# EAGLE board mercedes_shield_v1 (EAGLE 5.11)
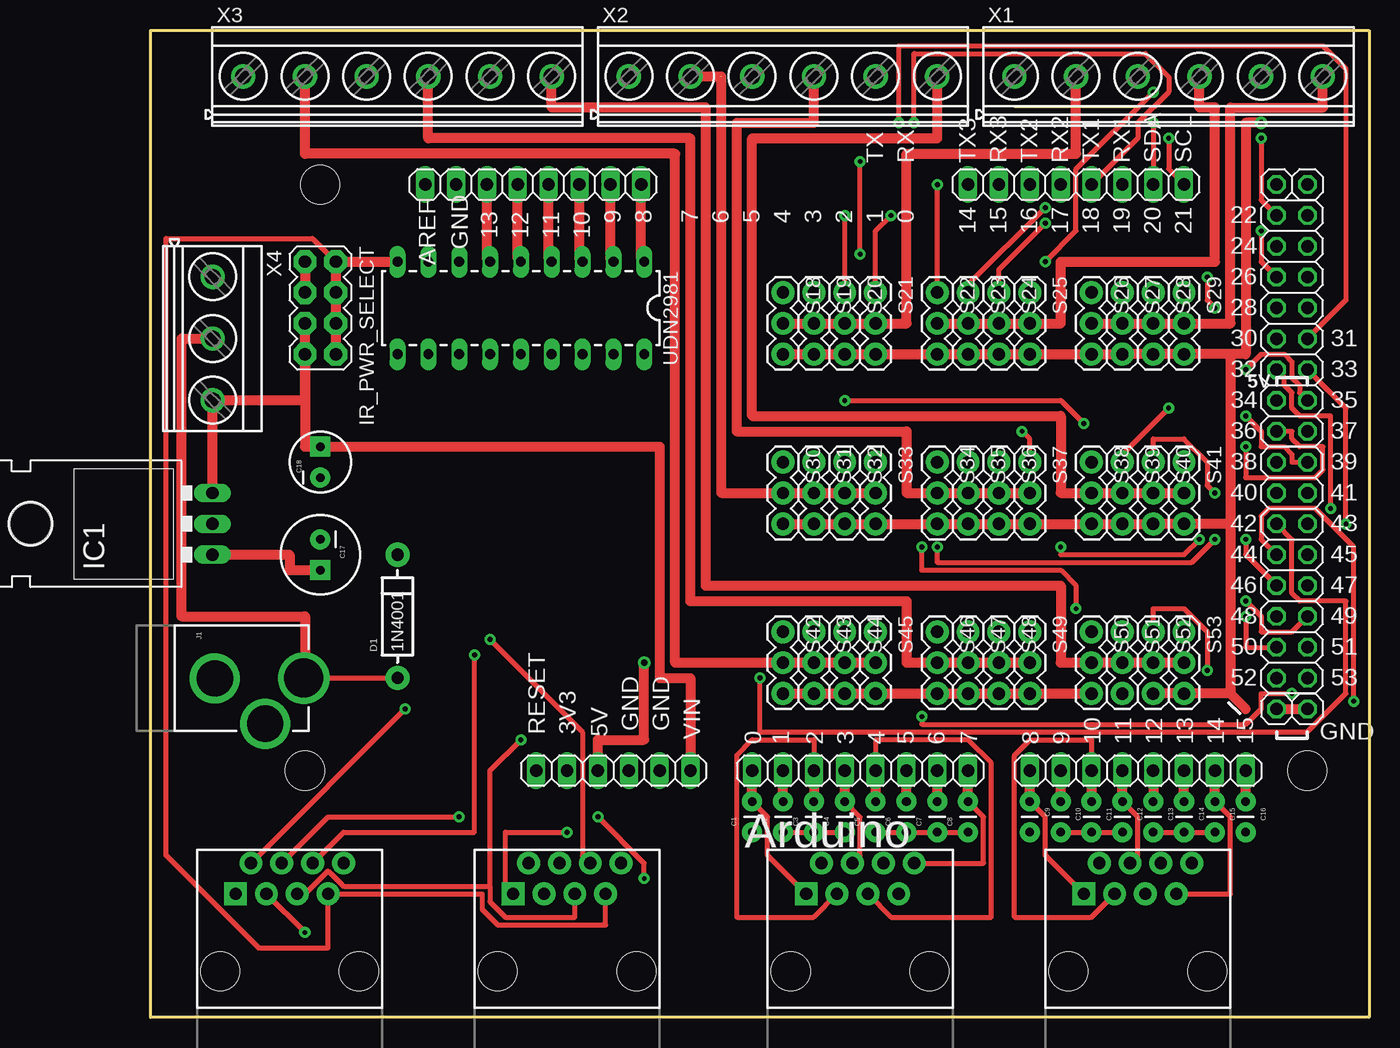
[diagram p0: board, top side]
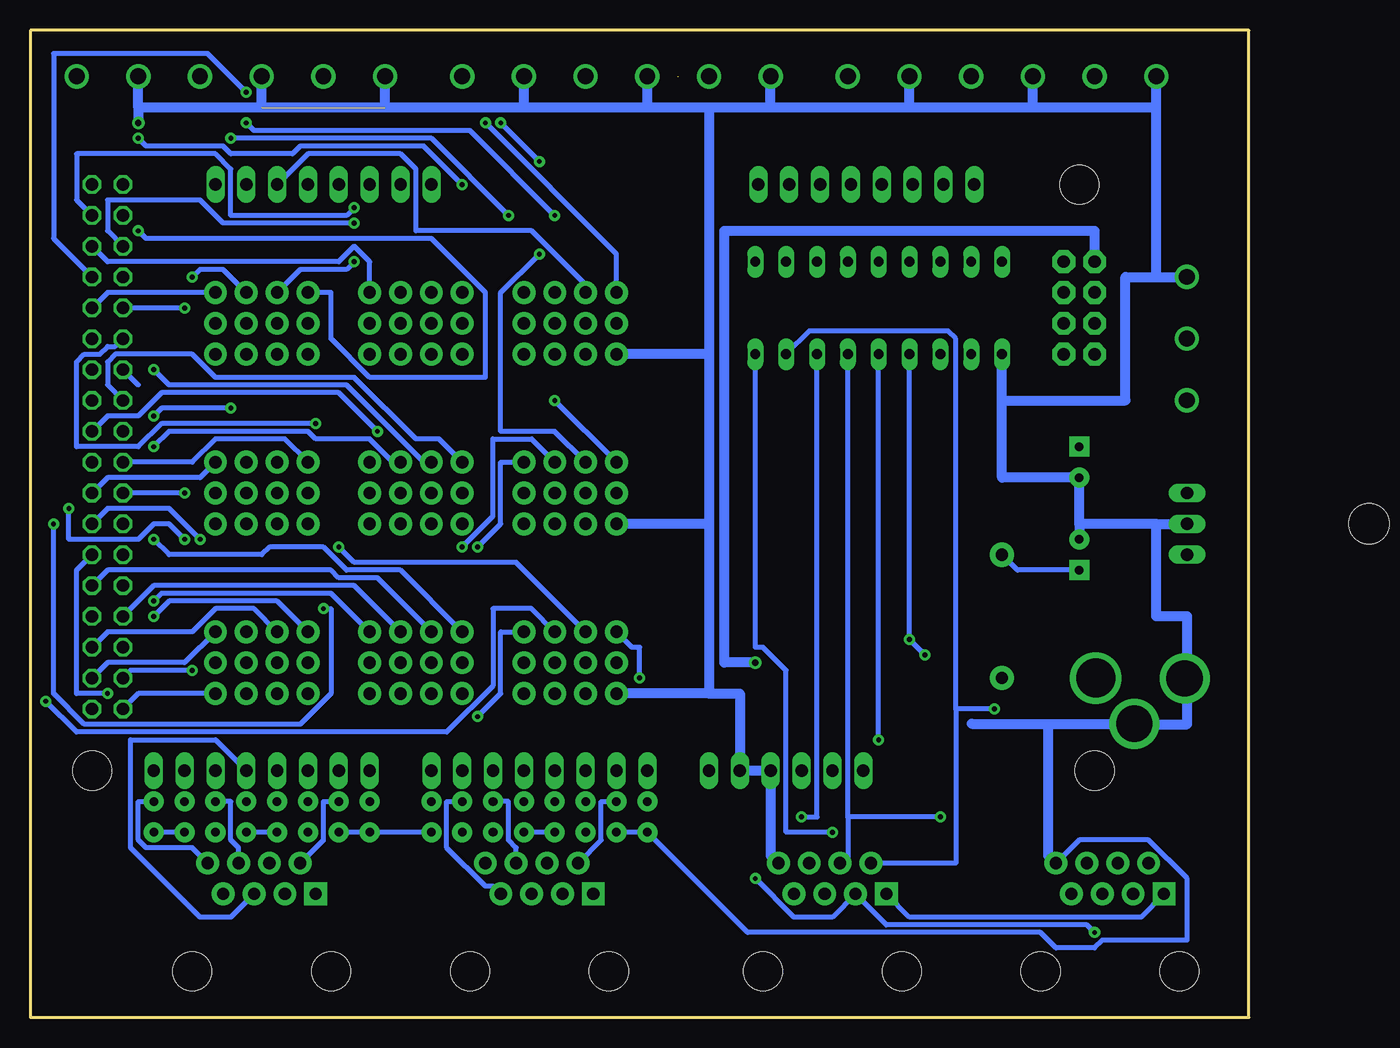
[diagram p1: board, bottom side, seen from below]

Size 100.33 x 81.28 mm. Coordinates in mm from the lower left corner, seen from the top.
Outline: 0,81.28 100.33,81.28 100.33,0 0,0 0,81.28
Copper layers (1*16): Top 0.035mm / dielectric 1.5mm / Bottom 0.035mm
Design rules "pcbtrain *": minimum track width 0.4mm, minimum drill 0.4mm, track to track 0.2mm, track to pad 0.2mm, pad to pad 0.2mm, via to via 0.2mm, smd to smd 0mil, copper to edge 10mil, drill to drill 0.2mm, minimum pad ring 10mil, minimum via ring 10mil, stop-mask expansion 0.125mm, vias tented up to drill 0mil, thermal gap 10mil
Net classes: 0 default: width 0.152 mm, drill 0.305 mm, clearance 0.152 mm
Holes 3.2 mm at 95.25,20.32 13.97,68.58 12.7,20.32

## Footprints (pad centres in the part's own frame; a part is rotated, then mirrored left to right if it is on the bottom)
RJ45-8 = drill 1 pad 1.88 square: 1 -4.445,6.35 | drill 1 pad 1.88 round: 2 -3.175,8.89; 3 -1.905,6.35; 4 -0.635,8.89; 5 0.635,6.35; 6 1.905,8.89; 7 3.175,6.35; 8 4.445,8.89 | hole 3.2: -5.715,0; 5.715,0
1X08 = drill 1.016 long: 1 -8.89,0; 2 -6.35,0; 3 -3.81,0; 4 -1.27,0; 5 1.27,0; 6 3.81,0; 7 6.35,0; 8 8.89,0
CAP-PTH-SMALL = drill 0.7 pad 1.651 round: 1 0,0; 2 2.54,0
CPOL-RADIAL-100UF-25V = drill 0.7 pad 1.651 square: 1 1.27,0 | drill 0.7 pad 1.651 round: 2 -1.27,0
CPOL-RADIAL-10UF-25V = drill 0.7 pad 1.651 square: 1 1.27,0 | drill 0.7 pad 1.651 round: 2 -1.27,0
DIODE-1N4001 = drill 1 pad 1.981 round: A -5.08,0; C 5.08,0
TO-220-ALT = drill 1.016 long: GND 0,-3.81; IN -2.54,-3.81; OUT 2.54,-3.81 | hole 3.302: 0,11.176
2X4 = drill 1.016 pad 1.88 octagon: 1 -3.81,-1.27; 2 -3.81,1.27; 3 -1.27,-1.27; 4 -1.27,1.27; 5 1.27,-1.27; 6 1.27,1.27; 7 3.81,-1.27; 8 3.81,1.27
POWER_JACK_PTH_LOCK = drill 2.997 pad 4.115 round: GND 0.025,6.557; GNDBREAK 3.762,10.7 | drill 3.2 pad 4.115 round: PWR 0,13.878
1X01 = drill 1.016 octagon: 1 0,0
1X06 = drill 1.016 long: 1 -6.35,0; 2 -3.81,0; 3 -1.27,0; 4 1.27,0; 5 3.81,0; 6 6.35,0
1X03 = drill 1.016 pad 1.88 round: 1 0,0; 2 2.54,0; 3 5.08,0
DIL18 = drill 0.813 long: 1 -10.16,-3.81; 2 -7.62,-3.81; 3 -5.08,-3.81; 4 -2.54,-3.81; 5 0,-3.81; 6 2.54,-3.81; 7 5.08,-3.81; 8 7.62,-3.81; 9 10.16,-3.81; 10 10.16,3.81; 11 7.62,3.81; 12 5.08,3.81; 13 2.54,3.81; 14 0,3.81; 15 -2.54,3.81; 16 -5.08,3.81; 17 -7.62,3.81; 18 -10.16,3.81
MKDSN1,5/6-5,08 = drill 1.3 pad 2 round: 1 -12.7,0.025; 2 -7.62,0.025; 3 -2.54,0.025; 4 2.54,0.025; 5 7.62,0.025; 6 12.7,0.025
MKDSN1,5/3-5,08 = drill 1.3 pad 2 round: 1 -7.641,0.025; 2 -2.561,0.025; 3 2.519,0.025
2X08 = drill 1.016 octagon: 1 -8.89,-1.27; 2 -8.89,1.27; 3 -6.35,-1.27; 4 -6.35,1.27; 5 -3.81,-1.27; 6 -3.81,1.27; 7 -1.27,-1.27; 8 -1.27,1.27; 9 1.27,-1.27; 10 1.27,1.27; 11 3.81,-1.27; 12 3.81,1.27; 13 6.35,-1.27; 14 6.35,1.27; 15 8.89,-1.27; 16 8.89,1.27

## Placement (x,y rotation side)
A0-8  RJ45-8PTH  [RJ45-8]  58.42,3.81 0 top
A8-15  RJ45-8PTH  [RJ45-8]  81.28,3.81 0 top
ADCH  [1X08]  81.28,20.32 0 top
ADCL  [1X08]  58.42,20.32 0 top
C1  0.1uF  [CAP-PTH-SMALL]  49.53,15.24 90 top
C2  0.1uF  [CAP-PTH-SMALL]  52.07,15.24 90 top
C3  0.1uF  [CAP-PTH-SMALL]  54.61,15.24 90 top
C4  0.1uF  [CAP-PTH-SMALL]  57.15,15.24 90 top
C5  0.1uF  [CAP-PTH-SMALL]  59.69,15.24 90 top
C6  0.1uF  [CAP-PTH-SMALL]  62.23,15.24 90 top
C7  0.1uF  [CAP-PTH-SMALL]  64.77,15.24 90 top
C8  0.1uF  [CAP-PTH-SMALL]  67.31,15.24 90 top
C9  0.1uF  [CAP-PTH-SMALL]  72.39,17.78 270 top
C10  0.1uF  [CAP-PTH-SMALL]  74.93,17.78 270 top
C11  0.1uF  [CAP-PTH-SMALL]  77.47,17.78 270 top
C12  0.1uF  [CAP-PTH-SMALL]  80.01,17.78 270 top
C13  0.1uF  [CAP-PTH-SMALL]  82.55,17.78 270 top
C14  0.1uF  [CAP-PTH-SMALL]  85.09,17.78 270 top
C15  0.1uF  [CAP-PTH-SMALL]  87.63,17.78 270 top
C16  0.1uF  [CAP-PTH-SMALL]  90.17,17.78 270 top
C17  100UF  [CPOL-RADIAL-100UF-25V]  13.97,38.1 270 top
C18  10uF  [CPOL-RADIAL-10UF-25V]  13.97,45.72 90 top
COMMUNICATION  [1X08]  76.2,68.58 180 top
D1  1N4001  [DIODE-1N4001]  20.32,33.02 90 top
IC1  [TO-220-ALT]  1.27,40.64 90 top
IR_PWR_SELECT  M04X2  [2X4]  13.97,58.42 270 top
J1  POWER_JACKPTH_LOCK  [POWER_JACK_PTH_LOCK]  -1.27,27.94 270 top
JP1  [1X01]  92.71,68.58 0 top
JP2  [1X01]  95.25,68.58 0 top
JP3  [1X01]  92.71,25.4 0 top
JP4  [1X01]  95.25,25.4 0 top
POWER  [1X06]  38.1,20.32 0 top
PWMH  [1X08]  31.5,68.58 180 top
S18  [1X03]  52.07,59.69 270 top
S19  [1X03]  54.61,59.69 270 top
S20  [1X03]  57.15,59.69 270 top
S21  [1X03]  59.69,59.69 270 top
S22  [1X03]  64.77,59.69 270 top
S23  [1X03]  67.31,59.69 270 top
S24  [1X03]  69.85,59.69 270 top
S25  [1X03]  72.39,59.69 270 top
S26  [1X03]  77.47,59.69 270 top
S27  [1X03]  80.01,59.69 270 top
S28  [1X03]  82.55,59.69 270 top
S29  [1X03]  85.09,59.69 270 top
S30  [1X03]  52.07,45.72 270 top
S31  [1X03]  54.61,45.72 270 top
S32  [1X03]  57.15,45.72 270 top
S33  [1X03]  59.69,45.72 270 top
S34  [1X03]  64.77,45.72 270 top
S35  [1X03]  67.31,45.72 270 top
S36  [1X03]  69.85,45.72 270 top
S37  [1X03]  72.39,45.72 270 top
S38  [1X03]  77.47,45.72 270 top
S39  [1X03]  80.01,45.72 270 top
S40  [1X03]  82.55,45.72 270 top
S41  [1X03]  85.09,45.72 270 top
S42  [1X03]  52.07,31.75 270 top
S43  [1X03]  54.61,31.75 270 top
S44  [1X03]  57.15,31.75 270 top
S45  [1X03]  59.69,31.75 270 top
S46  [1X03]  64.77,31.75 270 top
S47  [1X03]  67.31,31.75 270 top
S48  [1X03]  69.85,31.75 270 top
S49  [1X03]  72.39,31.75 270 top
S50  [1X03]  77.47,31.75 270 top
S51  [1X03]  80.01,31.75 270 top
S52  [1X03]  82.55,31.75 270 top
S53  [1X03]  85.09,31.75 270 top
U$3  RJ45-8PTH  [RJ45-8]  34.29,3.81 0 top
U$4  RJ45-8PTH  [RJ45-8]  11.43,3.81 0 top
UDN2981  [DIL18]  30.48,58.42 180 top
X1  MKDSN1,5/6-5,08  [MKDSN1,5/6-5,08]  83.82,77.47 0 top
X2  MKDSN1,5/6-5,08  [MKDSN1,5/6-5,08]  52.07,77.47 0 top
X3  MKDSN1,5/6-5,08  [MKDSN1,5/6-5,08]  20.32,77.47 0 top
X4  MKDSN1,5/3-5,08  [MKDSN1,5/3-5,08]  5.08,53.34 270 top
XIOH  [2X08]  93.98,57.15 90 top
XIOL  [2X08]  93.98,36.83 90 top

## Library data of the parts
A0-8 A8-15 C1-C18 D1 IC1 IR_PWR_SELECT J1 S18-S53 U$3 U$4 UDN2981 = SparkFun
ADCH ADCL COMMUNICATION JP1-JP4 POWER PWMH XIOH XIOL = pinhead
X1-X3 = con-phoenix-508; MPN: SMKDSN1,5/6-5,08; OC_FARNELL: 1792907; OC_NEWARK: 70R0302
X4 = con-phoenix-508; MPN: SMKDSN1,5/3-5,08; OC_FARNELL: 1792904; OC_NEWARK: 70R0299

## Nets
+3V3: POWER.2
+5V: IR_PWR_SELECT.1 IR_PWR_SELECT.3 POWER.3
ADC0: A0-8.1 ADCL.1 C1.2
ADC1: A0-8.2 ADCL.2 C2.2
ADC2: A0-8.3 ADCL.3 C3.2
ADC3: A0-8.4 ADCL.4 C4.2
ADC4: A0-8.5 ADCL.5 C5.2
ADC5: A0-8.6 ADCL.6 C6.2
ADC6: A0-8.7 ADCL.7 C7.2
ADC7: A0-8.8 ADCL.8 C8.2
ADC8: A8-15.1 ADCH.1 C9.1
ADC9: A8-15.2 ADCH.2 C10.1
ADC10: A8-15.3 ADCH.3 C11.1
ADC11: A8-15.4 ADCH.4 C12.1
ADC12: A8-15.5 ADCH.5 C13.1
ADC13: A8-15.6 ADCH.6 C14.1
ADC14: A8-15.7 ADCH.7 C15.1
ADC15: A8-15.8 ADCH.8 C16.1
AREF: PWMH.8
GND: C1.1 C2.1 C3.1 C4.1 C5.1 C6.1 C7.1 C8.1 C9.2 C10.2 C11.2 C12.2 C13.2 C14.2 C15.2 C16.2 C17.2 C18.2 IC1.GND J1.GND J1.GNDBREAK JP3.1 JP4.1 POWER.4 POWER.5 S18.3 S19.3 S20.3 S21.3 S22.3 S23.3 S24.3 S25.3 S26.3 S27.3 S28.3 S29.3 S30.3 S31.3 S32.3 S33.3 S34.3 S35.3 S36.3 S37.3 S38.3 S39.3 S40.3 S41.3 S42.3 S43.3 S44.3 S45.3 S46.3 S47.3 S48.3 S49.3 S50.3 S52.3 S53.3 U$3.8 U$4.8 UDN2981.10 X1.3 X1.5 X2.1 X2.3 X2.5 X3.3 X3.5 X4.1
IR_VCC: IR_PWR_SELECT.2 IR_PWR_SELECT.4 IR_PWR_SELECT.6 IR_PWR_SELECT.8 U$3.7 U$4.7 UDN2981.9
L1: U$3.1 U$4.1 UDN2981.18
L2: U$3.2 U$4.2 UDN2981.17
L3: U$3.3 U$4.3 UDN2981.16
L4: U$3.4 U$4.4 UDN2981.15
L5: U$3.5 U$4.5 UDN2981.14
N$1: PWMH.1 UDN2981.1
N$2: PWMH.2 UDN2981.2
N$3: PWMH.3 UDN2981.3
N$4: PWMH.4 UDN2981.4
N$5: PWMH.5 UDN2981.5
N$6: PWMH.6 UDN2981.6
N$7: S51.3
N$10: C17.1 D1.C IC1.IN
P18: COMMUNICATION.4 S18.1
P19: COMMUNICATION.3 S19.1
P20: COMMUNICATION.2 S20.1
P21: COMMUNICATION.1 S21.1
P22: S22.1 XIOH.16
P23: S23.1 XIOH.15
P24: S24.1 XIOH.14
P25: S25.1 XIOH.13
P26: S26.1 XIOH.12
P27: S27.1 XIOH.11
P28: S28.1 XIOH.10
P29: S29.1 XIOH.9
P30: S30.1 XIOH.8
P31: S31.1 XIOH.7
P32: S32.1 XIOH.6
P33: S33.1 XIOH.5
P34: S34.1 XIOH.4
P35: S35.1 XIOH.3
P36: S36.1 XIOH.2
P37: S37.1 XIOH.1
P38: S38.1 XIOL.16
P39: S39.1 XIOL.15
P40: S40.1 XIOL.14
P41: S41.1 XIOL.13
P42: S42.1 XIOL.12
P43: S43.1 XIOL.11
P44: S44.1 XIOL.10
P45: S45.1 XIOL.9
P46: S46.1 XIOL.8
P47: S47.1 XIOL.7
P48: S48.1 XIOL.6
P49: S49.1 XIOL.5
P50: S50.1 XIOL.4
P51: S51.1 XIOL.3
P52: S52.1 XIOL.2
P53: S53.1 XIOL.1
PSU_VIN: D1.A J1.PWR X4.2
RESET: POWER.1
RXD2: COMMUNICATION.5
RXD3: COMMUNICATION.7
S$2: X2.2
SV1: S18.2 S19.2 S20.2 S21.2 X1.2
SV2: S22.2 S23.2 S24.2 S25.2 X1.4
SV3: S26.2 S27.2 S28.2 S29.2 X1.6
SV4: S30.2 S31.2 S32.2 S33.2
SV5: S34.2 S35.2 S36.2 S37.2 X2.4
SV6: S38.2 S39.2 S40.2 S41.2 X2.6
SV7: S42.2 S43.2 S44.2 S45.2 X3.2
SV8: S46.2 S47.2 S48.2 S49.2 X3.4
SV9: S50.2 S51.2 S52.2 S53.2 X3.6
TXD2: COMMUNICATION.6
TXD3: COMMUNICATION.8
VI: U$3.6 U$4.6 UDN2981.13
VIN: C18.1 IC1.OUT IR_PWR_SELECT.5 IR_PWR_SELECT.7 POWER.6 X4.3

## Tracks (layer width: path | path; a pad name or v marks a point on that pad's centre or on a via)
+5V  (via drill 0.51)
  Top 0.813: IR_PWR_SELECT.1 IR_PWR_SELECT.3 | POWER.3 36.83,22.86 40.64,22.86 v40.64,29.21
  Bottom 0.813: v40.64,29.21 43.18,29.21 43.18,64.77 12.7,64.77 IR_PWR_SELECT.1
ADC0
  Top 0.4: A0-8.1 50.8,13.34 50.8,16.51 C1.2
  Top 0.813: C1.2 ADCL.1
ADC1
  Top 0.813: C2.2 ADCL.2
  Bottom 0.4: A0-8.2 53.34,14.61 53.34,17.78 C2.2
ADC2
  Top 0.4: A0-8.3 54.61,8.26 48.26,8.26 48.26,21.59 49.53,22.86 54.61,22.86 ADCL.3
  Top 0.813: ADCL.3 C3.2
ADC3
  Top 0.4: A0-8.4 58.42,13.34 58.42,16.51 C4.2
  Top 0.813: C4.2 ADCL.4
ADC4
  Top 0.4: A0-8.5 60.96,8.26 69.22,8.26 69.22,20.95 67.31,22.86 59.69,22.86 ADCL.5
  Top 0.813: ADCL.5 C5.2
ADC5
  Top 0.813: C6.2 ADCL.6
  Bottom 0.4: A0-8.6 60.32,13.97 60.96,14.61 60.96,17.78 C6.2
ADC6
  Top 0.813: C7.2 ADCL.7
  Bottom 0.4: A0-8.7 62.23,10.79 62.87,10.79 66.04,13.97 66.04,17.78 C7.2
ADC7
  Top 0.4: A0-8.8 68.58,12.7 68.58,16.51 C8.2
  Top 0.813: C8.2 ADCL.8
ADC8
  Top 0.4: A8-15.1 73.66,13.34 73.66,16.51 C9.1
  Top 0.813: C9.1 ADCH.1
ADC9
  Top 0.813: C10.1 ADCH.2
  Bottom 0.4: A8-15.2 76.2,14.61 76.2,17.78 C10.1
ADC10
  Top 0.4: A8-15.3 77.47,8.26 71.12,8.26 71.12,21.59 72.39,22.86 77.47,22.86 ADCH.3
  Top 0.813: ADCH.3 C11.1
ADC11
  Top 0.4: A8-15.4 81.28,13.34 81.28,16.51 C12.1
  Top 0.813: C12.1 ADCH.4
ADC12
  Top 0.813: ADCH.5 C13.1
  Bottom 0.4: A8-15.5 83.82,8.26 86.36,8.26 92.08,13.97 92.08,22.86 85.09,22.86 ADCH.5
ADC13
  Top 0.813: C14.1 ADCH.6
  Bottom 0.4: A8-15.6 83.19,13.97 83.82,14.61 83.82,17.78 C14.1
ADC14
  Top 0.4: A8-15.7 88.9,10.16 88.9,16.51 C15.1
  Top 0.813: C15.1 ADCH.7
ADC15
  Top 0.813: C16.1 ADCH.8
  Bottom 0.4: A8-15.8 87,13.97 90.81,13.97 91.44,14.61 91.44,17.78 C16.1
GND  (via drill 0.51)  (1 unrouted)
  Top 0.4: C15.2 C14.2 C13.2 | C12.2 C11.2 C10.2 | C8.1 C7.1 C6.1 C5.1 | C4.1 C3.1 C2.1
  Top 0.813: JP3.1 JP4.1 | S50.3 S49.3 S48.3 S47.3 S46.3 S45.3 S44.3 S43.3 S42.3 | S52.3 S53.3 88.9,26.67 | 88.9,26.67 90.17,25.4 | 88.9,40.64 S41.3 S40.3 S39.3 S38.3 S37.3 S36.3 S35.3 S34.3 S33.3 S32.3 S31.3 S30.3 | 88.9,40.64 88.9,26.67 | 88.9,54.61 S29.3 S28.3 S27.3 S26.3 S25.3 S24.3 S23.3 S22.3 S21.3 S20.3 S19.3 S18.3 | 88.9,54.61 88.9,40.64 | 88.9,54.61 90.17,54.61 90.17,73.66 v91.44,73.66
  Bottom 0.4: JP3.1 91.44,26.67 S53.3 | C15.2 C16.2 | C12.2 C13.2 | C10.2 C9.2 C8.1 | C4.1 C5.1 | C2.1 C1.1 41.27,6.99 17.14,6.99 15.88,5.71 12.7,5.71 12.07,6.35 5.08,6.35 5.08,11.43 8.26,14.61 13.97,14.61 U$4.8
  Bottom 0.813: U$3.8 39.37,13.34 POWER.4 POWER.5 41.91,26.67 44.45,26.67 | 91.44,74.93 X1.5 | 91.44,74.93 v91.44,73.66 | 44.45,26.67 S42.3 | 81.28,74.93 X1.3 | 81.28,74.93 91.44,74.93 | 59.69,74.93 X2.5 | 59.69,74.93 71.12,74.93 | 71.12,74.93 81.28,74.93 | 44.45,40.64 44.45,26.67 | 44.45,40.64 S30.3 | 44.45,54.61 44.45,40.64 | 44.45,54.61 S18.3 | 49.53,74.93 X2.3 | 49.53,74.93 59.69,74.93 | 44.45,74.93 49.53,74.93 | 44.45,74.93 44.45,54.61 | 39.37,74.93 X2.1 | 39.37,74.93 44.45,74.93 | 27.94,74.93 X3.5 | 27.94,74.93 39.37,74.93 | 17.78,74.93 X3.3 | 17.78,74.93 27.94,74.93 | X4.1 5.13,60.96 7.62,60.96 | 7.62,74.93 17.78,74.93 | 7.62,74.93 7.62,77.47 | 7.62,60.96 7.62,74.93 | 7.62,60.96 10.16,60.96 10.16,50.8 20.32,50.8 | 20.32,50.8 UDN2981.10 | 20.32,50.8 20.32,44.45 C18.2 13.97,40.64 | 13.97,40.64 C17.2 | 7.62,40.64 IC1.GND | 7.62,40.64 13.97,40.64 | 7.62,40.64 7.62,33.02 5.08,33.02 5.08,27.94 | J1.GND 5.11,27.91 5.08,27.94 | 5.08,27.94 5.08,24.13 9.38,24.13 J1.GNDBREAK 22.81,24.18 16.51,24.13 16.51,13.34 U$4.8 | 71.12,74.93 71.12,77.47
IR_VCC
  Top 0.4: U$3.7 37.46,7.62 28.57,7.62 27.3,8.89 27.3,10.16 U$4.7 14.61,5.71 8.89,5.71 1.27,13.34 1.27,64.14 13.34,64.14 IR_PWR_SELECT.2
  Top 0.813: IR_PWR_SELECT.8 IR_PWR_SELECT.6 IR_PWR_SELECT.4 IR_PWR_SELECT.2 UDN2981.9
L1  (via drill 0.4)
  Top 0.4: v34.29,15.24 29.21,15.24 29.21,10.79 U$3.1
  Bottom 0.4: UDN2981.18 40.64,30.48 40,30.48 38.1,28.57 38.1,15.24 v34.29,15.24 | U$4.1 8.89,8.26 27.94,8.26 U$3.1
L2  (via drill 0.4)
  Top 0.4: U$4.2 v20.96,25.4
  Bottom 0.4: UDN2981.17 36.2,56.52 24.77,56.52 24.13,55.88 24.13,25.4 | 24.13,25.4 24.13,12.7 U$3.2 | v20.96,25.4 24.13,25.4
L3  (via drill 0.4)
  Top 0.4: v36.83,16.51 40.64,12.7 v40.64,11.43 | v12.7,6.99 U$4.3
  Bottom 0.4: UDN2981.16 35.56,16.51 v36.83,16.51 | v40.64,11.43 37.46,8.26 34.29,8.26 U$3.3 29.84,7.62 13.34,7.62 v12.7,6.99
L4  (via drill 0.4)
  Top 0.4: U$4.4 14.61,16.51 v25.4,16.51
  Bottom 0.4: 33.02,16.51 33.02,12.7 U$3.4 | 33.02,16.51 UDN2981.15 | v25.4,16.51 33.02,16.51
L5  (via drill 0.4)
  Top 0.4: v30.48,22.86 27.94,20.32 27.94,10.79 | 27.94,10.79 27.94,9.53 29.21,8.26 34.92,8.26 U$3.5 | U$4.5 12.7,10.16 14.61,12.06 15.88,10.79 27.94,10.79
  Bottom 0.4: v30.48,22.86 UDN2981.14
N$1
  Top 0.813: PWMH.1 40.39,62.48 UDN2981.1
N$2
  Top 0.813: PWMH.2 37.85,62.48 UDN2981.2
N$3
  Top 0.813: PWMH.3 35.31,62.48 UDN2981.3
N$4
  Top 0.813: PWMH.4 32.77,62.48 UDN2981.4
N$5
  Top 0.813: PWMH.5 30.23,62.48 UDN2981.5
N$6
  Top 0.813: PWMH.6 27.69,62.48 UDN2981.6
N$10
  Top 0.813: IC1.IN 11.43,38.1 11.43,36.83 C17.1
  Bottom 0.4: D1.C 19.05,36.83 C17.1
P18  (via drill 0.4)
  Top 0.4: COMMUNICATION.4 81.28,72.39 81.28,73.66 83.82,76.2 83.82,77.47 81.92,79.38 62.87,79.38 v62.87,73.66
  Bottom 0.4: v62.87,73.66 52.07,62.87 S18.1
P19
  Bottom 0.4: COMMUNICATION.3 77.47,71.12 69.85,71.12 68.58,69.85 68.58,64.77 59.05,64.77 54.61,60.33 S19.1
P20  (via drill 0.4)
  Top 0.4: v82.55,73.66 COMMUNICATION.2 | S20.1 v57.15,66.04
  Bottom 0.4: v82.55,73.66 81.92,73.03 64.14,73.03 v57.15,66.04
P21  (via drill 0.4)
  Top 0.4: COMMUNICATION.1 83.82,69.85 v83.82,72.39 | v60.96,66.04 59.69,64.77 S21.1
  Bottom 0.4: v83.82,72.39 67.31,72.39 v60.96,66.04
P22  (via drill 0.4)
  Top 0.4: XIOH.16 91.44,67.31 v91.44,72.39 | S22.1 v64.77,68.58
  Bottom 0.4: v91.44,72.39 90.81,71.75 84.45,71.75 83.82,71.12 78.74,71.12 78.11,71.75 67.95,71.75 v64.77,68.58
P23  (via drill 0.4)
  Top 0.4: v73.66,66.67 67.31,60.33 S23.1
  Bottom 0.4: XIOH.15 96.52,67.31 96.52,71.12 85.09,71.12 83.82,69.85 83.82,66.04 74.3,66.04 v73.66,66.67
P24  (via drill 0.4)
  Top 0.4: v73.66,65.41 69.85,61.59 S24.1
  Bottom 0.4: XIOH.14 93.98,64.77 93.98,67.31 86.36,67.31 84.45,65.41 v73.66,65.41
P25
  Bottom 0.4: XIOH.13 93.98,62.23 74.93,62.23 73.66,63.5 72.39,62.23 S25.1
P26  (via drill 0.4)
  Top 0.4: XIOH.12 91.44,62.23 v91.44,64.77
  Bottom 0.4: v91.44,64.77 90.81,64.14 67.31,64.14 62.87,59.69 62.87,52.7 72.39,52.7 75.56,55.88 75.56,59.69 S26.1
P27  (via drill 0.4)
  Top 0.4: v82.55,76.2 76.2,69.85 76.2,64.77 v73.66,62.23
  Bottom 0.4: XIOH.11 98.42,64.14 98.42,79.38 85.73,79.38 v82.55,76.2 | v73.66,62.23 74.3,61.59 78.11,61.59 S27.1
P28  (via drill 0.4)
  Top 0.4: v87.63,58.42 87,59.05 v87,60.96
  Bottom 0.4: v87.63,58.42 XIOH.10 | v87,60.96 86.36,61.59 84.45,61.59 S28.1
P29
  Bottom 0.4: XIOH.9 93.98,59.69 S29.1
P30  (via drill 0.4)
  Top 0.4: v76.84,48.9 74.93,50.8 v57.15,50.8
  Bottom 0.4: XIOH.8 93.34,55.24 93.98,55.24 94.62,54.61 95.89,54.61 96.52,53.98 96.52,46.99 91.44,46.99 89.54,48.9 v76.84,48.9 | S30.1 v57.15,50.8
P31  (via drill 0.4)
  Top 0.4: XIOH.7 98.42,59.05 98.42,78.11 96.52,80.01 61.59,80.01 v61.59,73.66 | v58.42,62.87 v58.42,70.48
  Bottom 0.4: v58.42,70.48 v61.59,73.66 | v58.42,62.87 61.59,59.69 61.59,48.26 57.15,48.26 S31.1
P32  (via drill 0.4)
  Top 0.4: XIOH.6 93.34,52.7 93.34,52.07 93.98,51.44 93.98,50.16 94.62,49.53 97.16,49.53 v97.16,41.91 | v87.63,39.37 85.73,37.47 64.77,37.47 v64.77,38.73
  Bottom 0.4: XIOH.6 91.44,52.07 | v97.16,41.91 97.16,39.37 91.44,39.37 90.17,40.64 88.9,40.64 v87.63,39.37 | v64.77,38.73 62.23,41.27 62.23,47.62 59.05,47.62 S32.1
P33  (via drill 0.4)
  Top 0.4: XIOH.5 98.42,50.16 v98.42,40.64 | v76.2,33.66 76.2,35.56 74.93,36.83 63.5,36.83 v63.5,38.73
  Bottom 0.4: v98.42,40.64 98.42,26.67 95.89,24.13 78.11,24.13 75.56,26.67 75.56,33.66 v76.2,33.66 | v63.5,38.73 61.59,40.64 61.59,45.72 S33.1
P34
  Bottom 0.4: XIOH.4 93.98,52.07 93.98,53.98 93.34,54.61 87,54.61 85.09,52.7 73.66,52.7 68.58,47.62 66.67,47.62 S34.1
P35  (via drill 0.4)
  Top 0.4: XIOH.3 94.62,51.44 94.62,52.07 93.98,52.7 93.98,53.98 93.34,54.61 91.44,54.61 v90.17,53.34
  Bottom 0.4: v90.17,53.34 88.9,52.07 74.3,52.07 67.95,45.72 S35.1
P36  (via drill 0.4)
  Top 0.4: XIOH.2 93.98,48.26 93.98,47.62 94.62,46.99 96.52,46.99 96.52,45.09 95.89,44.45 90.17,44.45 v90.17,46.99
  Bottom 0.4: v90.17,46.99 88.9,48.26 77.47,48.26 76.84,47.62 72.39,47.62 70.48,45.72 S36.1
P37  (via drill 0.4)
  Top 0.4: v71.76,48.26 72.39,47.62 S37.1
  Bottom 0.4: XIOH.1 93.98,49.53 91.44,49.53 89.54,51.44 74.93,51.44 v71.76,48.26
P38
  Bottom 0.4: XIOL.16 87,45.72 85.09,47.62 79.38,47.62 S38.1
P39  (via drill 0.4)
  Top 0.4: XIOL.15 93.98,45.72 93.98,46.35 93.34,46.99 91.44,46.99 91.44,48.26 v90.17,49.53 | v83.82,50.16 80.01,46.35 S39.1
  Bottom 0.4: v90.17,49.53 89.54,50.16 v83.82,50.16
P40  (via drill 0.4)
  Top 0.4: v87.63,43.18 87,43.81 87,45.72 85.09,47.62 82.55,47.62 S40.1
  Bottom 0.4: v87.63,43.18 XIOL.14
P41
  Bottom 0.4: XIOL.13 93.98,44.45 86.36,44.45 S41.1
P42  (via drill 0.4)
  Top 0.4: XIOL.12 93.98,39.37 93.98,34.92 94.62,34.29 98.42,34.29 98.42,26.67 95.25,23.5 50.16,23.5 v50.16,27.94
  Bottom 0.4: v50.16,27.94 50.16,30.48 50.8,30.48 S42.1
P43  (via drill 0.4)
  Top 0.4: v86.36,39.37 85.09,38.1 74.93,38.1 v74.93,38.73
  Bottom 0.4: XIOL.11 93.98,41.91 88.9,41.91 v86.36,39.37 | v74.93,38.73 73.66,37.47 60.32,37.47 S43.1
P44  (via drill 0.4)
  Top 0.4: XIOL.10 91.44,39.37 91.44,41.27 92.08,41.91 95.89,41.91 99.06,38.73 v99.06,26.04
  Bottom 0.4: v99.06,26.04 96.52,23.5 66.04,23.5 62.23,27.3 62.23,33.66 59.05,33.66 S44.1
P45  (via drill 0.4)
  Top 0.4: v93.98,26.67 91.44,26.67 91.44,25.4 90.17,24.13 63.5,24.13 v63.5,24.77
  Bottom 0.4: XIOL.9 96.52,36.83 96.52,26.67 v93.98,26.67 | v63.5,24.77 61.59,26.67 61.59,31.75 S45.1
P46  (via drill 0.4)
  Top 0.4: XIOL.8 90.17,38.1 v90.17,39.37
  Bottom 0.4: v90.17,39.37 88.9,38.1 81.28,38.1 80.65,38.73 76.2,38.73 74.3,36.83 69.85,36.83 S46.1
P47
  Bottom 0.4: XIOL.7 93.98,36.83 75.56,36.83 74.93,36.2 71.76,36.2 S47.1
P48
  Bottom 0.4: XIOL.6 90.17,35.56 73.66,35.56 S48.1
P49  (via drill 0.4)
  Top 0.4: XIOL.5 93.98,31.75 91.44,31.75 91.44,33.02 v90.17,34.29
  Bottom 0.4: v90.17,34.29 89.54,34.92 75.56,34.92 S49.1
P50  (via drill 0.4)
  Top 0.4: XIOL.4 90.17,30.48 v90.17,33.02
  Bottom 0.4: v90.17,33.02 88.9,34.29 80.01,34.29 S50.1
P51
  Bottom 0.4: XIOL.3 93.98,31.75 87,31.75 85.09,33.66 81.92,33.66 S51.1
P52  (via drill 0.4)
  Top 0.4: v87,28.57 87,31.75 85.09,33.66 82.55,33.66 S52.1
  Bottom 0.4: XIOL.2 92.08,28.57 v87,28.57
P53
  Bottom 0.4: XIOL.1 93.98,29.21 87.63,29.21 S53.1
PSU_VIN
  Top 0.4: J1.PWR D1.A
  Top 0.813: X4.2 2.56,55.9 2.54,55.88 2.54,33.02 12.7,33.02 12.7,28.03 J1.PWR
S$2  (1 unrouted)
  Top 0.813: X2.2 46.99,77.5 46.99,77.47
SV1
  Top 0.813: S18.2 S19.2 S20.2 S21.2 62.23,57.15 62.23,71.12 76.2,71.12 X1.2
SV2
  Top 0.813: S22.2 S23.2 S24.2 S25.2 74.93,57.15 74.93,62.23 87.63,62.23 87.63,74.93 86.36,74.93 X1.4
SV3
  Top 0.813: S26.2 S27.2 S28.2 S29.2 88.9,57.15 88.9,74.93 96.52,74.93 X1.6
SV4
  Top 0.813: S33.2 S32.2 S31.2 S30.2 46.99,43.18 46.99,77.47
SV5
  Top 0.813: X2.4 54.61,73.66 48.26,73.66 48.26,48.26 62.23,48.26 62.23,43.18 S34.2 S35.2 S36.2 S37.2
SV6
  Top 0.813: S41.2 S40.2 S39.2 S38.2 74.93,43.18 74.93,49.53 49.53,49.53 49.53,72.39 64.77,72.39 X2.6
SV7
  Top 0.813: X3.2 12.7,71.12 43.18,71.12 43.18,29.21 S42.2 S43.2 S44.2 S45.2
SV8
  Top 0.813: X3.4 22.86,72.39 44.45,72.39 44.45,34.29 62.23,34.29 62.23,29.21 S46.2 S47.2 S48.2 S49.2
SV9
  Top 0.813: X3.6 33.02,74.93 45.72,74.93 45.72,35.56 74.93,35.56 74.93,29.21 S50.2 S51.2 S52.2 S53.2
VI  (via drill 0.4)
  Top 0.4: v27.94,31.11 35.56,23.5 35.56,13.34 U$3.6 | U$4.6 15.88,15.24 26.67,15.24 v26.67,29.84
  Bottom 0.4: UDN2981.13 v27.94,31.11 v26.67,29.84
VIN
  Top 0.813: IR_PWR_SELECT.7 IR_PWR_SELECT.5 | IC1.OUT 5.11,43.2 X4.3 12.68,50.82 12.7,50.8 IR_PWR_SELECT.7 | IR_PWR_SELECT.7 12.7,46.99 C18.1 41.91,46.99 41.91,27.94 44.45,27.94 POWER.6

## Text on the board
tPlace: 9 | 8 | 7 | 6 | 5 | 4 | 3 | 2 | 1 | 0 | 14 | 15 | 16 | 17 | 18 | 19 | 20 | 21 | 22 | 13 | 12 | 11 | 10 | 24 | 26 | 28 | 30 | 31 | 32 | 33 | 34 | 35 | 36 | 37 | 38 | 39 | 40 | 41 | 42 | 43 | 44 | 45 | 46 | 47 | 48 | 49 | 50 | 51 | 52 | 53 | 0 | 1 | 2 | 3 | 4 | 5 | 6 | 7 | 8 | 9 | 10 | 11 | 12 | 13 | 14 | 15
tNames: TX | RX | TX3 | RX3 | TX2 | RX2 | TX1 | RX1 | SDA | SCL | GND | AREF | 5V | GND | GND | RESET | 3V3 | 5V | VIN | GND | Arduino
ReferenceLC: L | TX | RX | PC1 | PC2